# Altium PCB RFM69HCW_Arduino_PCBDoc.pcbdoc
Units mil, origin at the board's own origin, x right, y up, seen from the top; angles counter-clockwise.
Board outline 3988.62 x 3962.54 mil, 2 copper layers (Top Layer, Bottom Layer); 27 components, 32 nets, 91 pads, 143 vias.
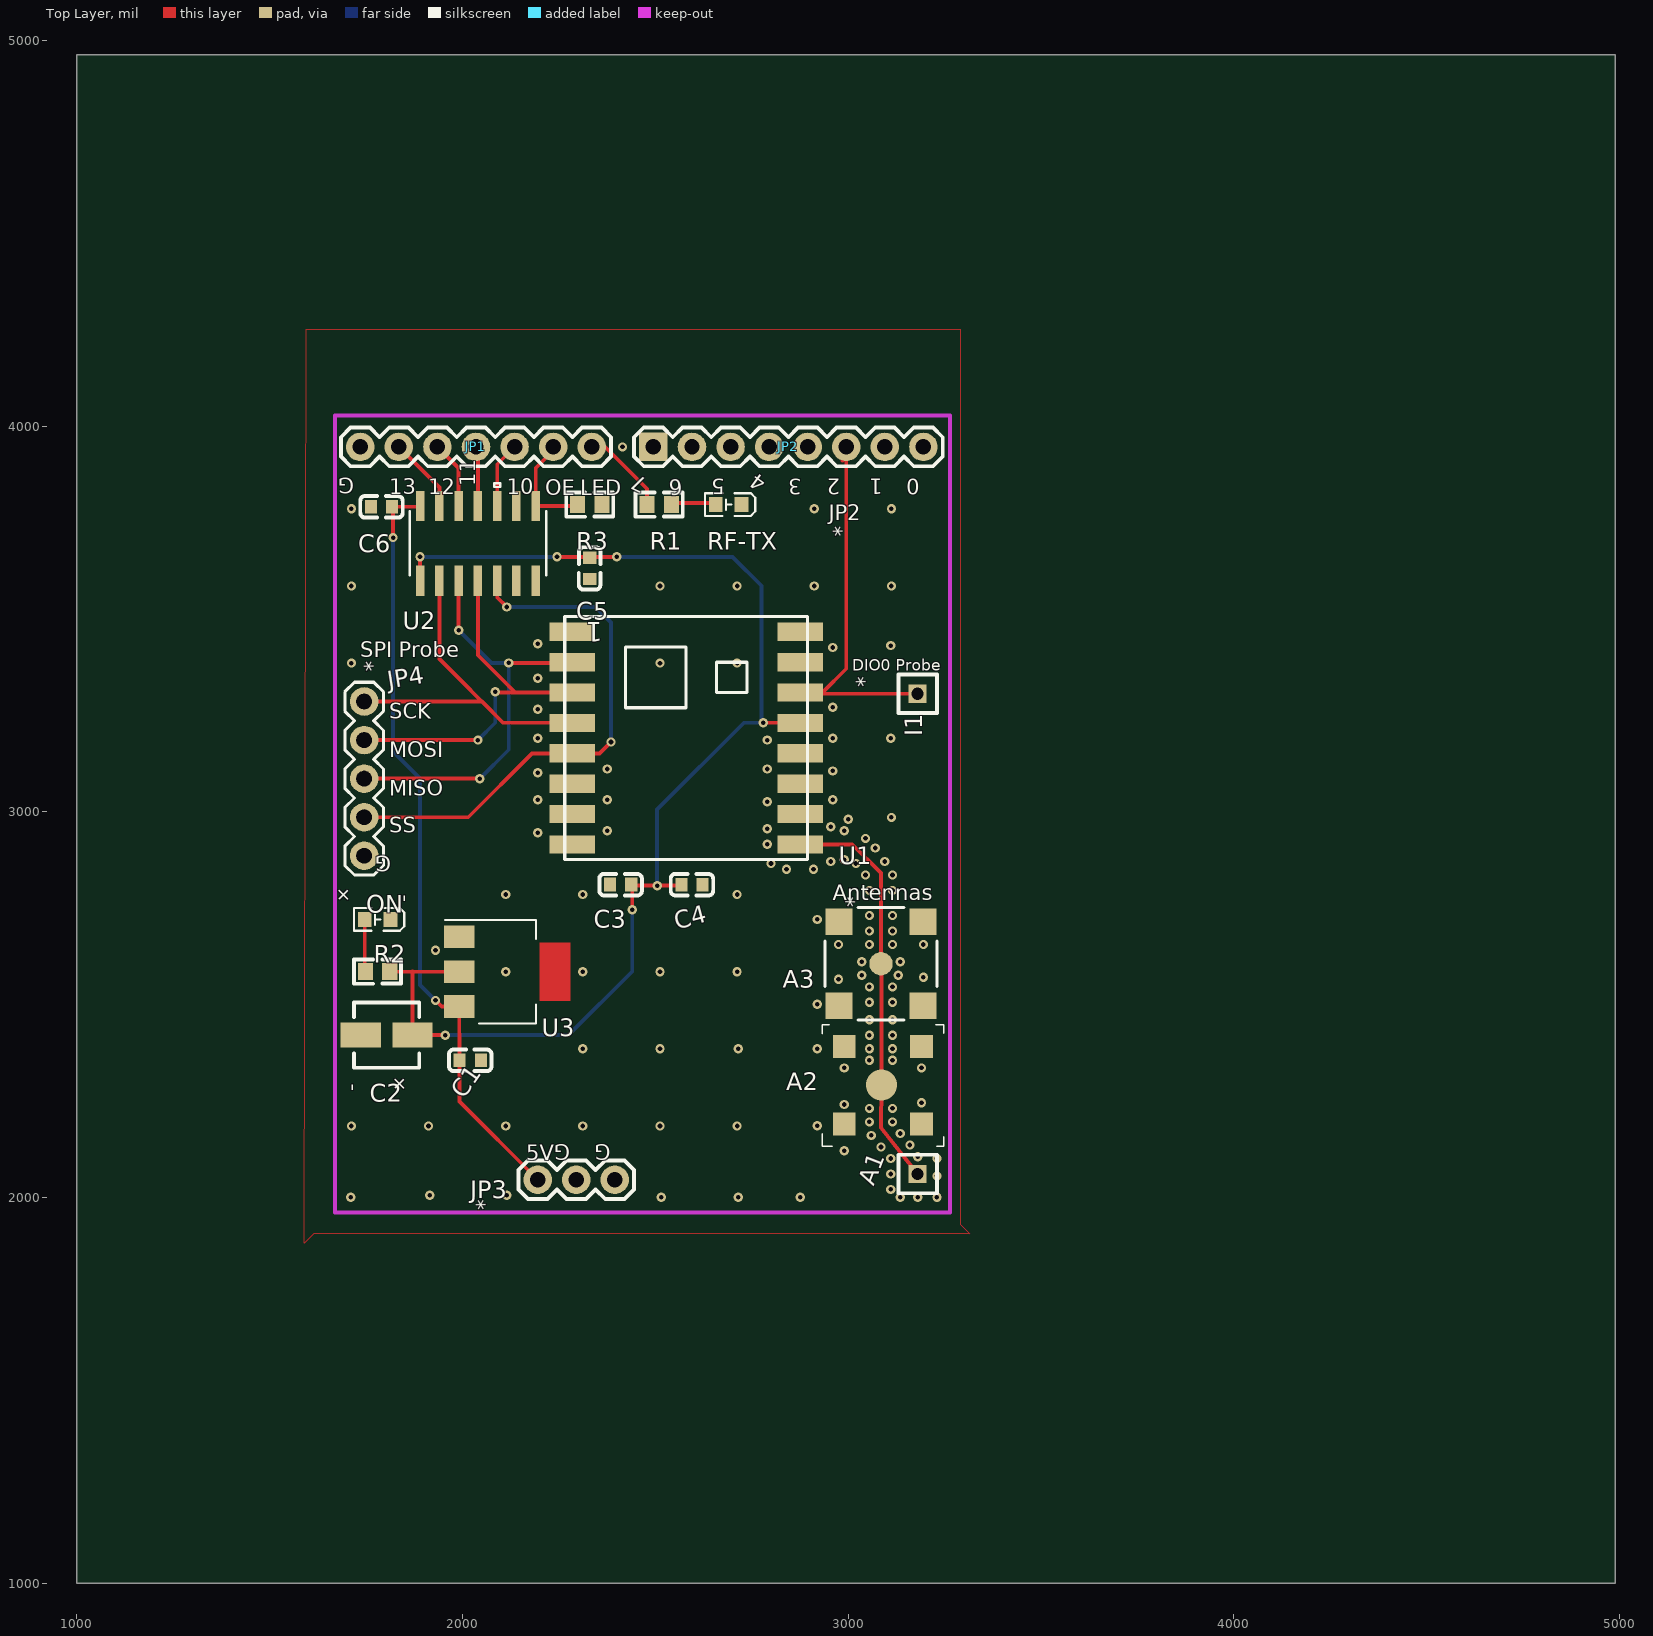
[diagram p0: Top Layer view]
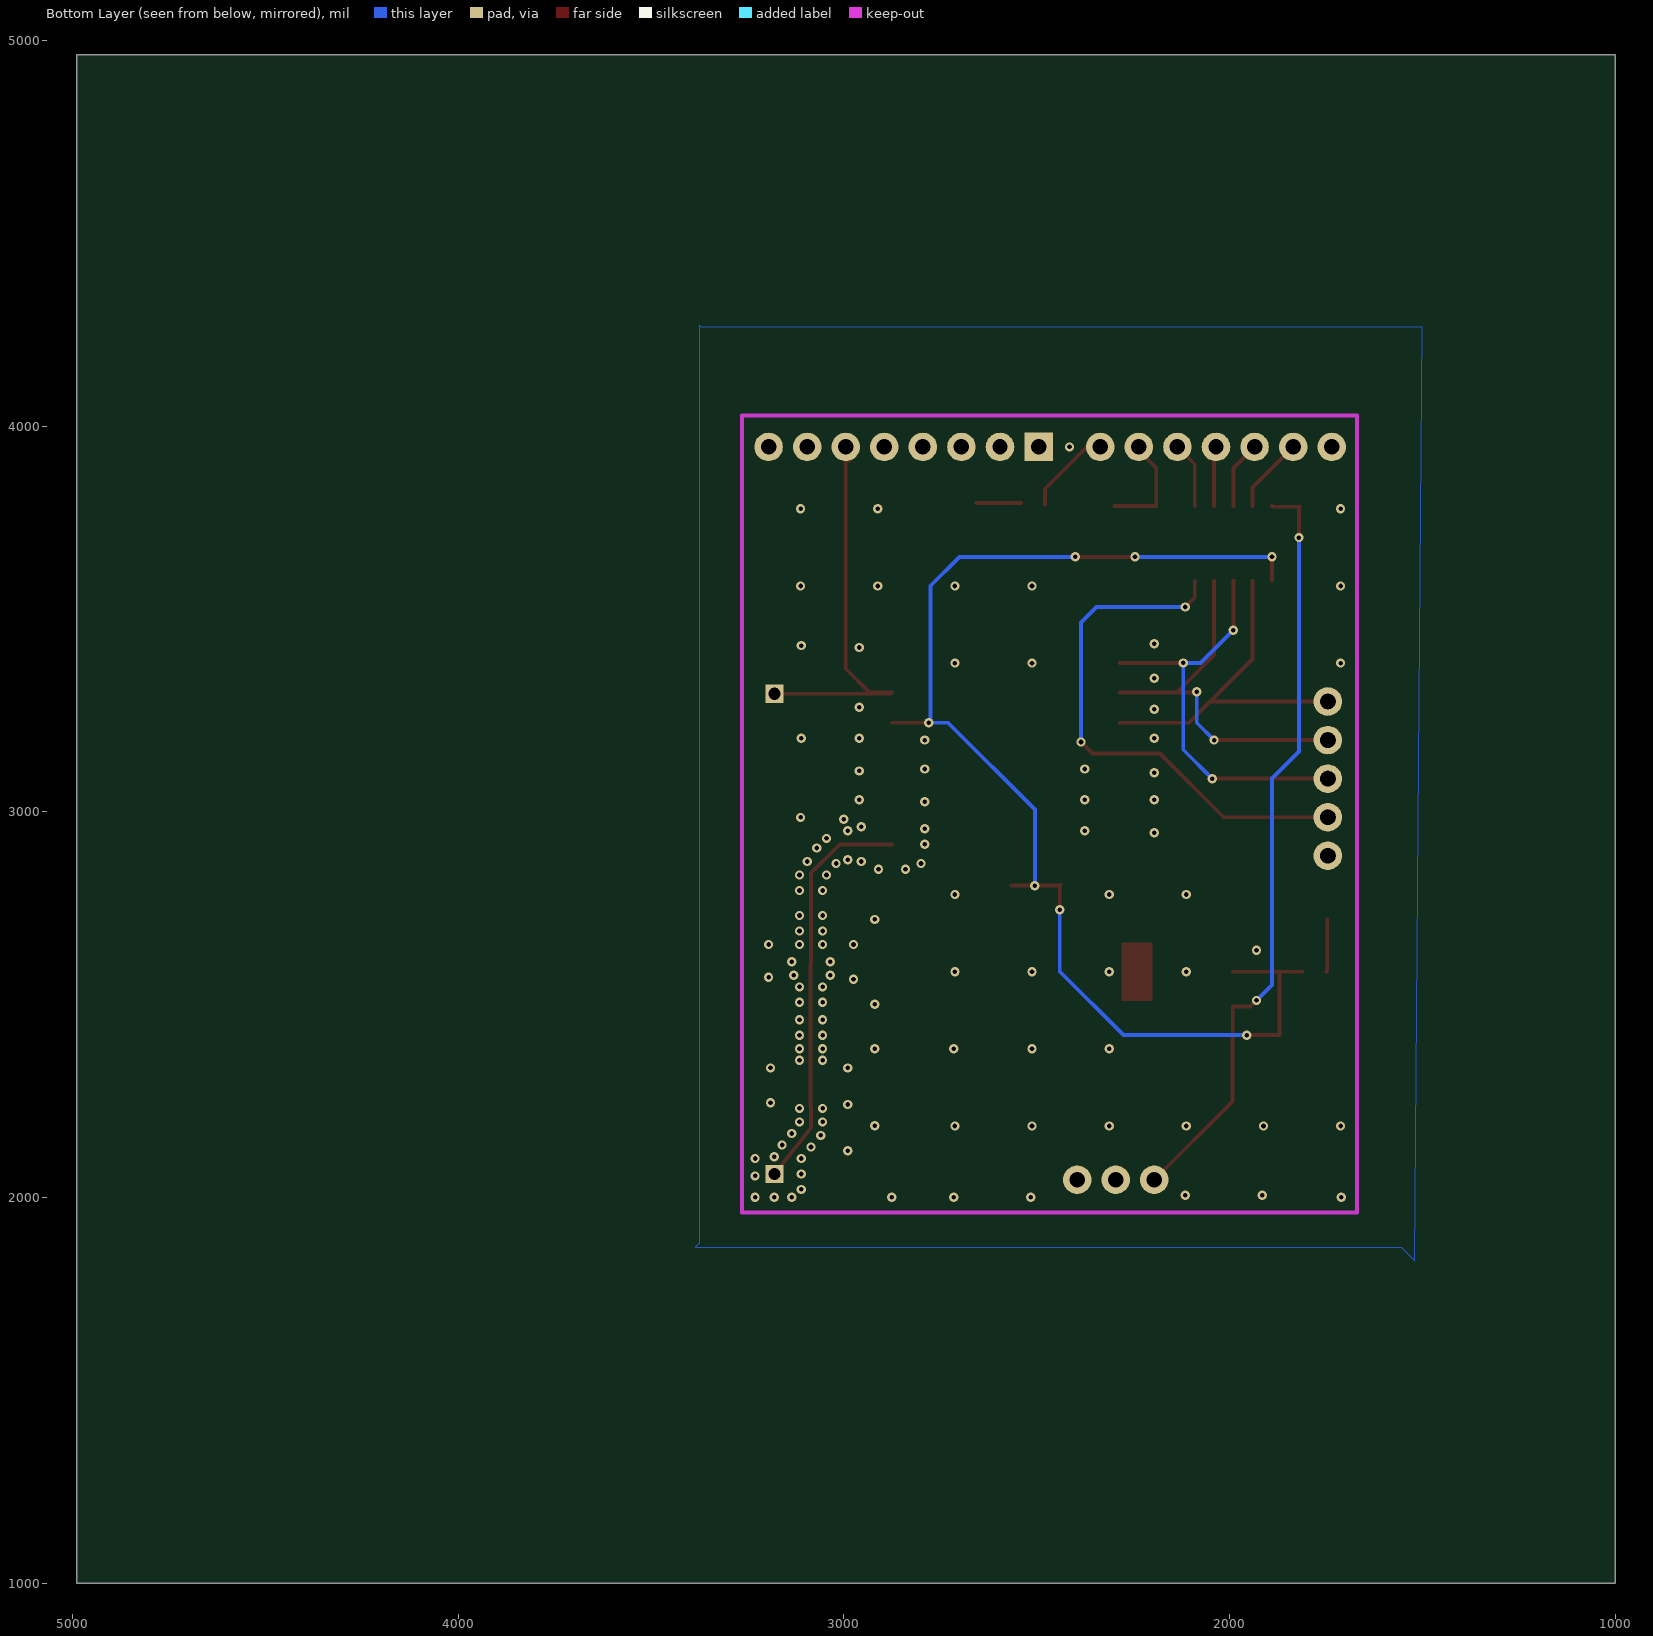
[diagram p1: Bottom Layer view, seen from below]

## Layer stack, top to bottom
Top Layer: signal copper (thickness not stored)
Dielectric: dielectric 12.6, FR-4, Dk 4.8
Bottom Layer: signal copper (thickness not stored)

## Board outline
4988.62,1000 1000,1000 1000,4962.54 4988.62,4962.54

## Components (designator, comment, footprint, x,y, rotation, side; value= is the part's Value field where it differs from the comment)
A1 "Single Header" M1X1 3180,2060.84 r90 top
A2 "CONSMA001-SMD-G-ND" RF_SMA_RECEPTICAL_VERTICAL_CONSMA001-SMD-G 3090,2290.84 r90 top
A3 "CONSMA002-SMD" CON-SMA-SMD-RA 3085,2605.84 r90 top
C1 "100nF" C0603 2020,2355.84 r180 top
C2 "10uF" UWT(4X5.4) 1815,2420.84 r180 top
C3 "100nF" C0603 2410,2811.19 r180 top
C4 "100nF" C0603 2595,2810.49 r0 top
C5 "100nF" C0603 2330,3630.84 r90 top
C6 "100nF" C0603 1790,3790.84 r180 top
I1 "Single Header" M1X1 3180,3305.84 r0 top
JP1 "M07" 1X07 2035,3945.84 r0 top
JP2 "M08" 1X08 2845,3945.84 r0 top
JP3 "M03" 1X03 2295,2045.84 r0 top
JP4 "M05PTH" 1X05 1745,3285.84 r270 top
ON "LTST-C191KGKT" LED0603-RD 1780,2720.84 r180 top
R1 "1K" R0603 2510,3796.45 r0 top
R2 "1K" R0603 1780,2585.84 r180 top
R3 "100K" R0603 2330,3796.65 r180 top
RF-TX "LTST-C191KRKT" LED0603-RD 2690,3796.55 r180 top
U1 "RFM69HCW" RFM69HCW-XXXS2 2580,3190.84 r0 top
U2 "TXB0104DR" D14_TEX 2040,3695.84 r90 top
U3 "LD1117S33CTR" SOT-223 2100,2645.84 r0 top
? "" ? 3561.42,2993.22 r0 top
? "" ? 2467.5,4398.19 r0 top
? "" ? 3440.81,2723.92 r0 top
? "" ? 3341.8,3000.72 r0 top
? "" ? 2765,4090.24 r0 top

## Footprints (in the part's own frame and the unit in brackets; to place one, negate y for a bottom-side part, rotate by r counter-clockwise, add the part's x,y. Pads: shape width x height; smd on the part's side, far side on the other; paste and mask are expansions set on the pad)
1X03 [mil]
  round 74 hole 40: 1(-100,0) 2(0,0) 3(100,0)
  silkscreen extent -150,-50 150,50
1X05 [mil]
  round 74 hole 40 slot 40.2 at 90 deg: 1(0,0) 2(100,0) 3(200,0) 4(300,0) 5(400,0)
  silkscreen extent -50,-50 450,50
1X07 [mil]
  round 74 hole 40: 1(-300,0) 2(-200,0) 3(-100,0) 4(0,0) 5(100,0) 6(200,0) 7(300,0)
  silkscreen extent -350,-50 350,50
1X08 [mil]
  rect 74x74 hole 40: 1(-350,0)
  round 74 hole 40: 2(-250,0) 3(-150,0) 4(-50,0) 5(50,0) 6(150,0) 7(250,0) 8(350,0)
  silkscreen extent -400,-50 400,50
C0603 [mm]
  rect 0.8x0.9 smd: 1(-0.7,0) 2(0.7,0)
  silkscreen extent -1.4,-0.7 1.4,0.72
CON-SMA-SMD-RA [mil]
  round 60.5 smd: 1(0,0)
  rect 69.5x69.5 smd: 2(-109,109) 3(109,109) 4(109,-109) 5(-109,-109)
  silkscreen extent -146,-146 146,146
D14_TEX [mil]
  rect 78x22 smd: 1(-97,150) 2(-97,100) 3(-97,50) 4(-97,0) 5(-97,-50) 6(-97,-100) 7(-97,-150) 8(97,-150) 9(97,-100) 10(97,-50) 11(97,0) 12(97,50) 13(97,100) 14(97,150)
  silkscreen extent -84,-177 156,177
LED0603-RD [mm]
  rect 0.9x1 smd: 1(-0.85,0) 2(0.85,0)
  silkscreen extent -1.75,-0.75 1.55,0.75
M1X1 [mil]
  rect 47.2x47.2 hole 31.4: 1(0,0)
  silkscreen extent -50,-50 50,50
R0603 [mm]
  rect 1x1.1 smd: 1(-0.8,0) 2(0.8,0)
  silkscreen extent -1.55,-0.8 1.55,0.81
RF_SMA_RECEPTICAL_VERTICAL_CONSMA001-SMD-G [mil]
  rect 59.05x59.05 smd: 1(-100.39,-100.39) 1(-100.39,100.39) 1(100.39,-100.39) 1(100.39,100.39)
  round 80.71 smd: 2(0.98,3.94)
  silkscreen extent -157,-157 157,157
RFM69HCW-XXXS2 [mm]
  rect 3x1.2 smd: 1(-7.5,7) 2(-7.5,5) 3(-7.5,3) 4(-7.5,1) 5(-7.5,-1) 6(-7.5,-3) 7(-7.5,-5) 8(-7.5,-7) 9(7.5,-7) 10(7.5,-5) 11(7.5,-3) 12(7.5,-1) 13(7.5,1) 14(7.5,3) 15(7.5,5) 16(7.5,7)
  silkscreen extent -8,-8 8,8
SOT-223 [mm]
  rect 2x1.5 smd: 1(-2.755,0.762) 2(-2.755,-1.538) 3(-2.755,-3.838)
  round 0 smd: 4(3.545,-1.538)
  Top Layer region: 2.545,0.362 4.545,0.362 4.545,-3.438 2.545,-3.438
  silkscreen extent -3.71,-4.95 2.3,1.87
UWT(4X5.4) [mm]
  rect 2.65x1.65 smd: 1(-1.4,0) 2(2,0)
  silkscreen extent -1.85,-2.15 2.45,2.15
? [mil]

## Via types
v1: diameter 24.02, hole 12.01, Top Layer to Bottom Layer, 143 vias

## Nets (pads, with @x,y where several pads share a name; then routed paths per layer and width w, separated by ;. In a path a pad name is that pad's centre, name@x,y a point inside that pad or via, vN(x,y) a via of type N, cw(c..) or ccw(c..) an arc to the next point about the centre after c; other vN are vias at no path point)
0/DIO0: I1.1 JP2.6 U1.14 | length 1065.5
  Top Layer w10: JP2.6@2985,3910.84 2995,3920.84 JP2.6 2995,3370.84 2933.1,3308.94 2875.3,3308.94 2878.4,3305.84 I1.1
+3.3V: C2.1 C3.1 C4.1 C5.2 R2.1 U1.13 U2.1 U3.2 | length 3335.2
  Top Layer w10: R2.1 U3.2 ; 1870.26,2585.68 1870.12,2585.54 C2.1 v1(1955,2420.84) ; U2.1 v1(1890,3660.84) ; v1(2245,3660.84) 2330,3660.84 v1(2400,3660.84) ; C3.1@2437.56,2810.84 2440.01,2808.39 v1(2504.7,2808.39) ; v1(2440,2745.84) C3.1@2440,2810.84 ; v1@2504.7,2808.34 C4.1@2565,2808.34 ; v1(2780,3230.84) U1.13@2874.7,3230.84
  Bottom Layer w10: v1(1890,3660.84) v1(2245,3660.84) ; v1(1955,2420.84) 2275,2420.84 2440,2585.84 v1(2440,2745.84) ; v1@2395,3660.84 2700,3660.84 2775,3585.84 v1@2775,3230.84 ; v1@2504.7,2808.34 2504.7,3005.54 2730,3230.84 v1(2780,3230.84)
+5V: C1.2 C6.1 JP3.1 U2.14 U3.3 | length 1997.4
  Top Layer w10: C6.1 1888,3790.84 U2.14 ; v1(1820,3710.84) C6.1@1820,3788.44 ; v1(1930,2510.84) 1946.1,2494.74 U3.3 C1.2 1992.44,2248.4 JP3.1
  Bottom Layer w10: v1(1820,3710.84) 1820,3155.84 1890,3085.84 1890,2550.84 v1(1930,2510.84)
ANT: A1.1 A2.2 A3.1 U1.9 | length 1054
  Top Layer w10: U1.9 3010.59,2915.25 3085,2840.84 A3.1 3086.06,2604.78 A2.2 3085,2180.84 A1.1
DIO1: U1.15
DIO2: U1.16
DIO3: U1.11
DIO4: U1.12
DIO5: U1.7
GND: A2.1 A3.2 A3.3 A3.4 A3.5 C1.1 C2.2 C3.2 C4.2 C5.1 C6.2 JP1.1 JP3.2 JP3.3 JP4.5 ON.1 R3.1 RF-TX.1 U1.1 U1.8 U1.10 U2.7 U3.1
  other v1: 1710,2000.84 2515,2000.84 2715,2000.84 2875.65,2000.84 3135,2000.84 3180,2000.84 3230,2000.84 1915,2005.84 2115,2005.84 3110,2020.84 3230,2055.84 3110,2060.84 3110,2100.84 3230,2100.84 3180,2105.84 2990,2120.84 3085,2130.84 3160,2135.84 3060,2160.84 3135,2165.84 1711.99,2185.35 1911.99,2185.35 2111.99,2185.35 2311.99,2185.35 2511.99,2185.35 2711.99,2185.35 2920,2185.84 3055,2195.84 3115,2195.84 3055,2230.84 3115,2230.84 2990,2240.84 3190,2245.84 2990,2335.84 3190,2335.84 3055,2355.84 3115,2355.84 2311.99,2385.35 2511.99,2385.35 2715,2385.84 2920,2385.84 3055,2385.84 3115,2385.84 3055,2420.84 3115,2420.84 3055,2460.84 3115,2460.84 2920,2500.84 3055,2505.84 3115,2505.84 3055,2545.84 3115,2545.84 2975,2565.84 3195,2570.84 3035,2575.84 3130,2575.84 2111.99,2585.35 2311.99,2585.35 2511.99,2585.35 2711.99,2585.35 3035,2610.84 3135,2610.84 1930,2640.84 2975,2655.84 3055,2655.84 3115,2655.84 3195,2655.84 3055,2690.84 3115,2690.84 2920,2720.84 3055,2730.84 3115,2730.84 2111.99,2785.35 2311.99,2785.35 2711.99,2785.35 3055,2795.84 3115,2795.84 3045,2835.84 3115,2835.84 2840,2850.84 2910,2850.84 2800,2865.84 3020,2865.84 2955,2870.84 3095,2870.84 2990,2875.84 3070,2905.84 2790,2915.84 3045,2930.84 2195,2945.84 2375,2950.84 2990,2950.84 2790,2955.84 2955,2960.84 3000,2980.84 3111.99,2985.35 2790,3025.84 2195,3030.84 2375,3030.84 2960,3030.84 2195,3100.84 2960,3105.84 2375,3110.84 2790,3110.84 2790,3110.84 2790,3185.84 2195,3190.84 2960,3190.84 3110,3190.84 2195,3265.84 2960,3270.84 2195,3345.84 1711.99,3385.35 2511.99,3385.35 2711.99,3385.35 2960,3425.84 3110,3430.84 2195,3435.84 1711.99,3585.35 2511.99,3585.35 2711.99,3585.35 2911.99,3585.35 3111.99,3585.35 1711.99,3785.35 2911.99,3785.35 3111.99,3785.35 2415,3945.84
MISO3.3: JP4.3 U1.2 U2.3 | length 1090.9
  Top Layer w10: JP4.3 v1(2045,3085.84) ; v1(1990,3470.84) U2.3 ; v1(2120,3385.84) 2284.73,3385.84 U1.2
  Bottom Layer w10: v1(1990,3470.84) 2075,3385.84 v1(2120,3385.84) 2120,3160.84 v1(2045,3085.84)
MISO5: JP1.3 U2.12 | length 175.8
  Top Layer w10: JP1.3 1990,3890.84 U2.12
MOSI3.3: JP4.2 U1.3 U2.4 | length 969.2
  Top Layer w10: JP4.2 v1(2040,3185.84) ; U2.4 2040,3405.84 2136.89,3308.95 ; v1(2085,3310.84) 2086.89,3308.95 2136.89,3308.95 ; U1.3 2136.89,3308.95
  Bottom Layer w10: v1(2040,3185.84) 2085,3230.84 v1(2085,3310.84)
MOSI5: JP1.4 U2.11 | length 155.1
  Top Layer w10: JP1.4 2035,3940.84 2040,3935.84 U2.11
OE: JP1.6 R3.2 U2.8 | length 293.7
  Top Layer w10: JP1.6@2247.7,3941.14 JP1.6 2235,3935.84 2190,3890.84 U2.8 R3.2@2298.5,3792.84
ON_2: ON.2 R2.2 | length 135.8
  Top Layer w10: ON.2 1746.54,2587.8 R2.2
R1_1: JP1.7 R1.1 | length 229.3
  Top Layer w10: JP1.7 2370,3945.84 2478.51,3837.33 R1.1
RESET: U1.6
RF-TX_2: R1.2 RF-TX.2 | length 116.5
  Top Layer w10: R1.2@2540,3800.84 RF-TX.2@2656.5,3800.84
RX: JP2.8
S$68: 
S$2910: 
SCK3.3: JP4.1 U1.4 U2.2 | length 999.5
  Top Layer w10: JP4.1 2050.63,3285.84 2105.63,3230.84 ; U2.2 1940,3395.84 2105,3230.84 U1.4
SCK5: JP1.2 U2.13 | length 196.5
  Top Layer w10: JP1.2 1940,3840.84 U2.13
SS3.3: JP4.4 U1.5 U2.5 | length 1395.7
  Top Layer w10: JP4.4 2015,2985.84 2180.63,3151.47 U1.5 ; U2.5 2090,3555.84 v1(2115,3530.84) ; U1.5@2284.7,3151.44 2355.6,3151.44 v1(2385,3180.84)
  Bottom Layer w10: v1(2115,3530.84) 2345,3530.84 2385,3490.84 v1(2385,3180.84)
SS5: JP1.5 U2.10 | length 171.6
  Top Layer w10: U2.10 2090,3900.84 JP1.5
SW0: JP2.1
SW1: JP2.2
SW2: JP2.3
SW3: JP2.4
SW4: JP2.5
TX: JP2.7
pads on no net: U2.6 U2.9 U3.4

## Polygon pours and split planes (outlines as drawn)
GND on Bottom Layer (solid): 1500,4255.84 3370,4255.84 3375,4260.84 3375,1880.84 3385,1870.84 1555,1870.84 1520,1835.84
GND on Top Layer (solid): 1595,4250.84 3290,4250.84 3290,1930.84 3315,1905.84 1615,1905.84 1590,1880.84

## Silkscreen, mask and mechanical layers (free items; w line width, h text height)
Top Overlay:
  text "G" at 1720,3865.53 h39.37 r180
  text "6" at 2568.28,3862.95 h39.37 r185
  text "5" at 2680,3863.03 h39.37 r180
  text "3" at 2880,3863.03 h39.37 r180
  text "2" at 2980,3863.03 h39.37 r180
  text "1" at 3090,3863.03 h39.37 r180
  text "0" at 3185,3863.03 h39.37 r180
  text "7" at 2482.09,3861.1 h39.37 r155
  text "4" at 2791.57,3859.27 h39.37 r144
  text "11" at 2033.55,3843.34 h39.37 r90
  text "13" at 1810,3823.66 h39.37
  text "12" at 1911.01,3823.66 h39.37
  text "10" at 2115,3823.66 h39.37
  text "OE" at 2215,3821.16 h39.37
  text "LED" at 2305,3821.16 h39.37
  text "JP2" at 2950,3756.16 h39.37
  text "SPI Probe" at 1735,3401.16 h39.37
  text "*" at 3029.86,3367.71 h39.37 r211
  text "DIO0 Probe" at 3010,3366.08 h29.53
  text "SCK" at 1810,3241.16 h39.37
  text "MOSI" at 1810,3141.16 h39.37
  text "MISO" at 1810,3041.16 h39.37
  text "SS" at 1810,2946.16 h39.37
  text "G" at 1815,2885.53 h39.37 r180
  text "+" at 1718.92,2779.76 h39.37 r135
  text "Antennas" at 2960,2771.16 h39.37
  text "-" at 1864.68,2765.84 h39.37 r90
  text "*" at 2979.86,2748.97 h39.37 r329
  text "+" at 1863.92,2289.76 h39.37 r135
  text "-" at 1729.68,2275.84 h39.37 r90
  text "G" at 2280,2138.03 h39.37 r180
  text "G" at 2385,2138.03 h39.37 r180
  text "5V" at 2165,2096.16 h39.37
Document:
  lines w10 net S$2910: 2190,3795.84 2300,3795.84

## Text inside footprints (layer, text, board x,y; h text height)
A2: Document "REF" at 2999.45,2252.45 h29.53 r90
U1: Top Overlay "1" at 2364.06,3490.84 h50 r180
U2: Top Overlay "*" at 1754.86,3407.71 h39.37 r211; Top Overlay "*" at 2044.86,2012.71 h39.37 r211; Document "*" at 1959.86,3613.97 h39.37 r329; Top Overlay "*" at 2969.86,3757.71 h39.37 r211; Document "Copyright 2016 Accelerated Designs. All rights reserved." at 2107.5,3530.84 h5 r90; Document "0.05in/1.27mm" at 1800.69,3511.17 h39.37 r2; Document "0.022in/0.559mm" at 1800.69,3636.17 h39.37 r2; Document "0.194in/4.928mm" at 1800.69,3696.17 h39.37 r2; Document "0.078in/1.981mm" at 1800.69,3576.17 h39.37 r2